# Altium PCB PCBJpepz.PcbDoc (part 1 of 2)
Units mm, origin at the board's own origin, x right, y up, seen from the top; angles counter-clockwise.
Board outline 100 x 110 mm, 2 copper layers (Top Layer, Bottom Layer); 249 components, 163 nets, 729 pads, 129 vias.
Unrouted connection lines stored in the file: 167.
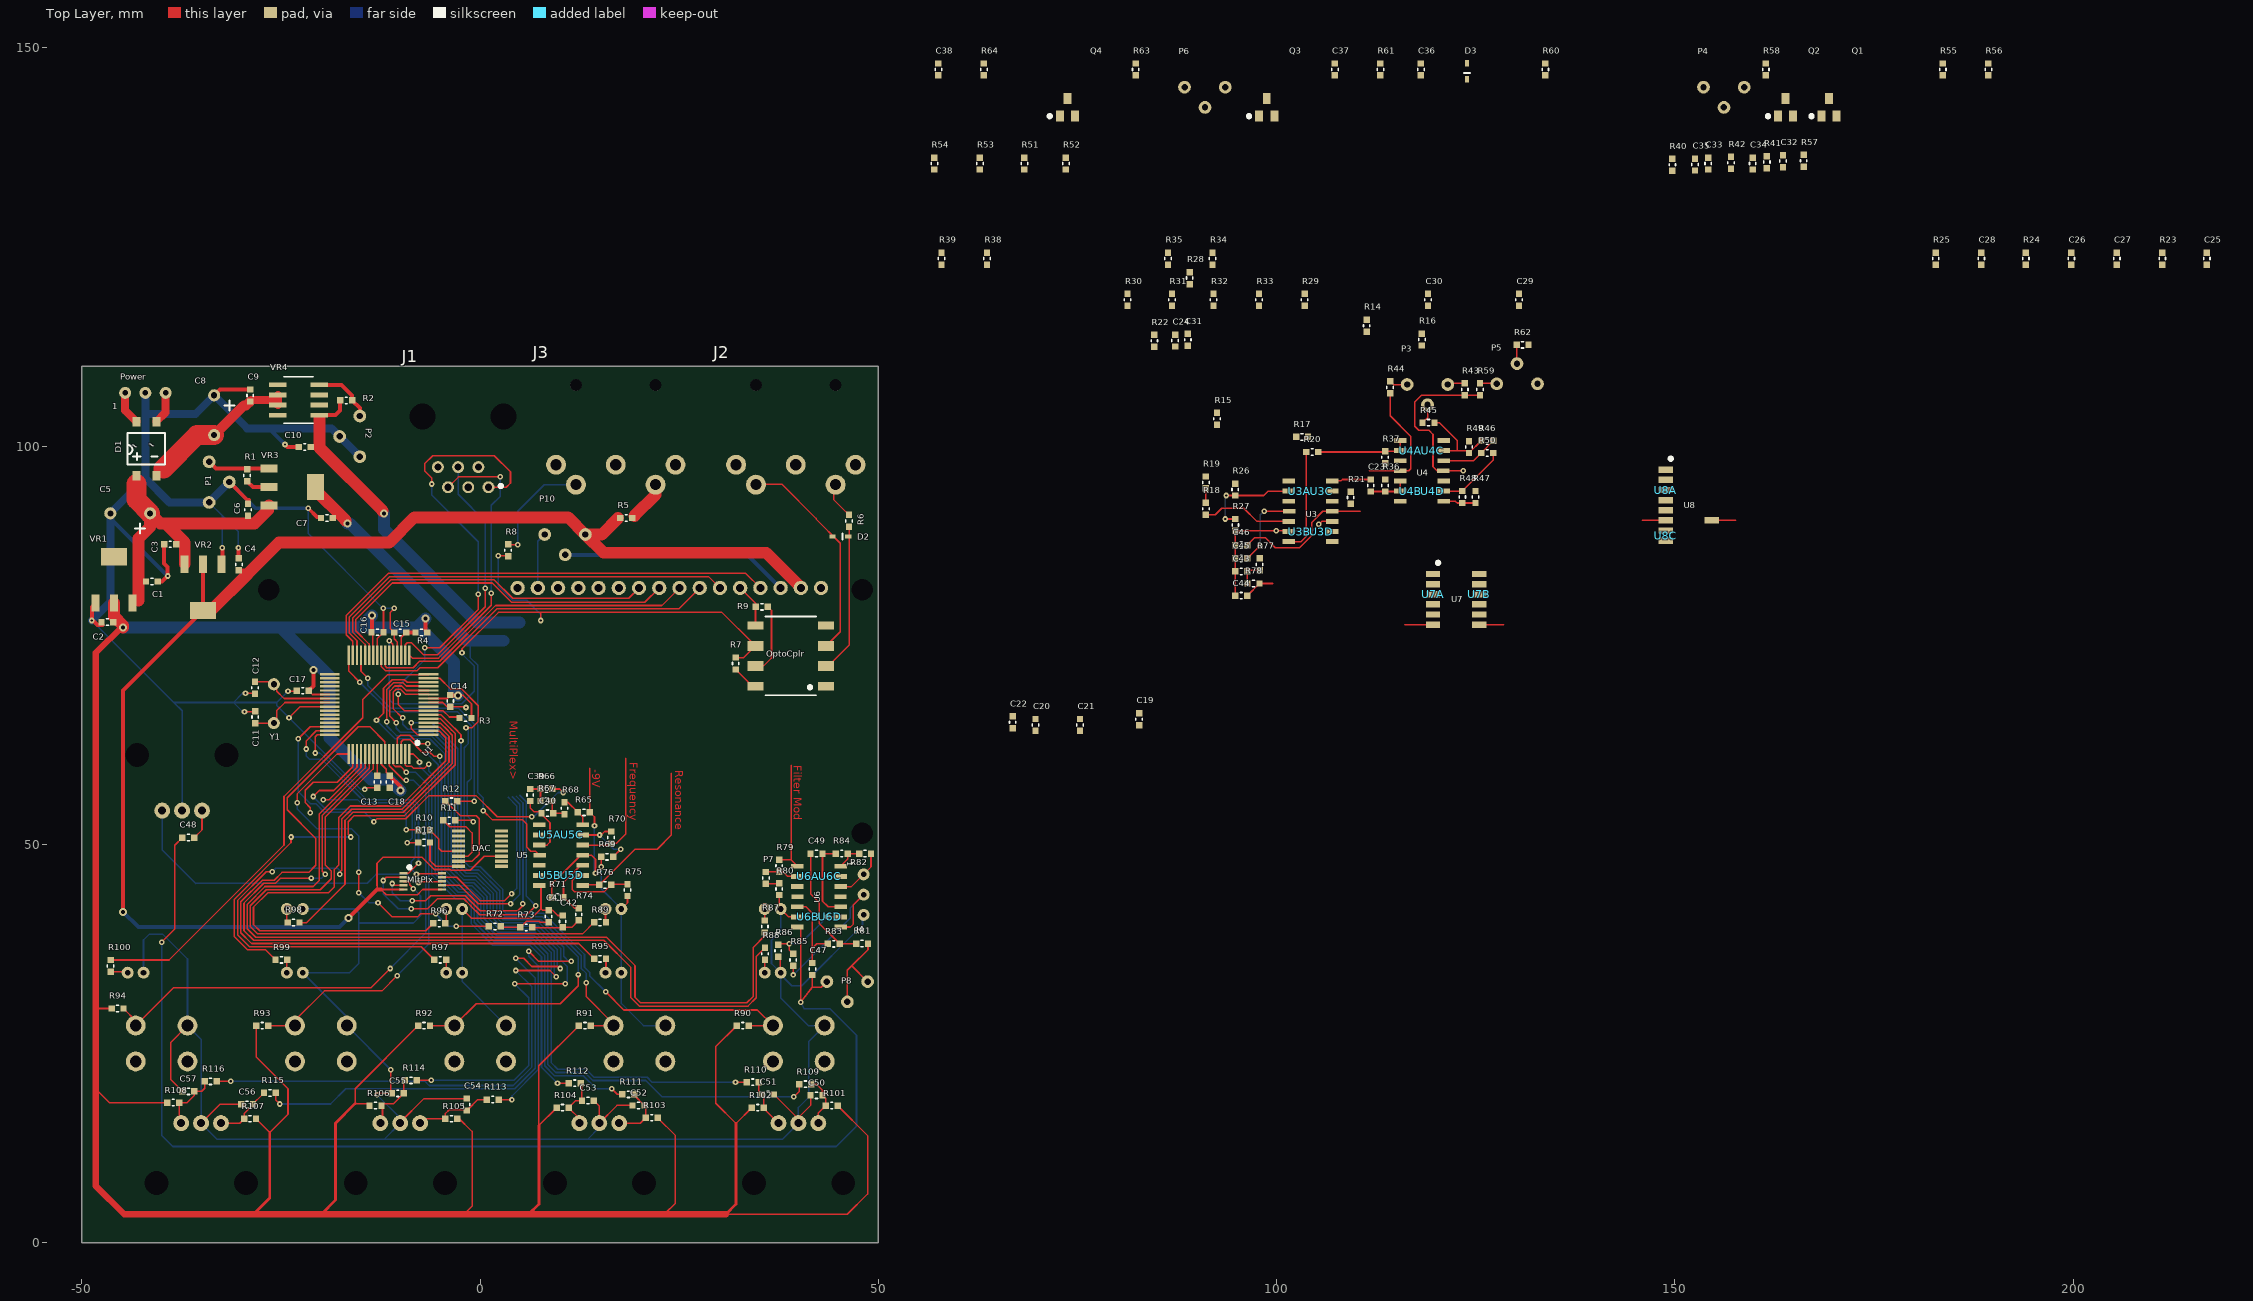
[diagram p0: Top Layer view]
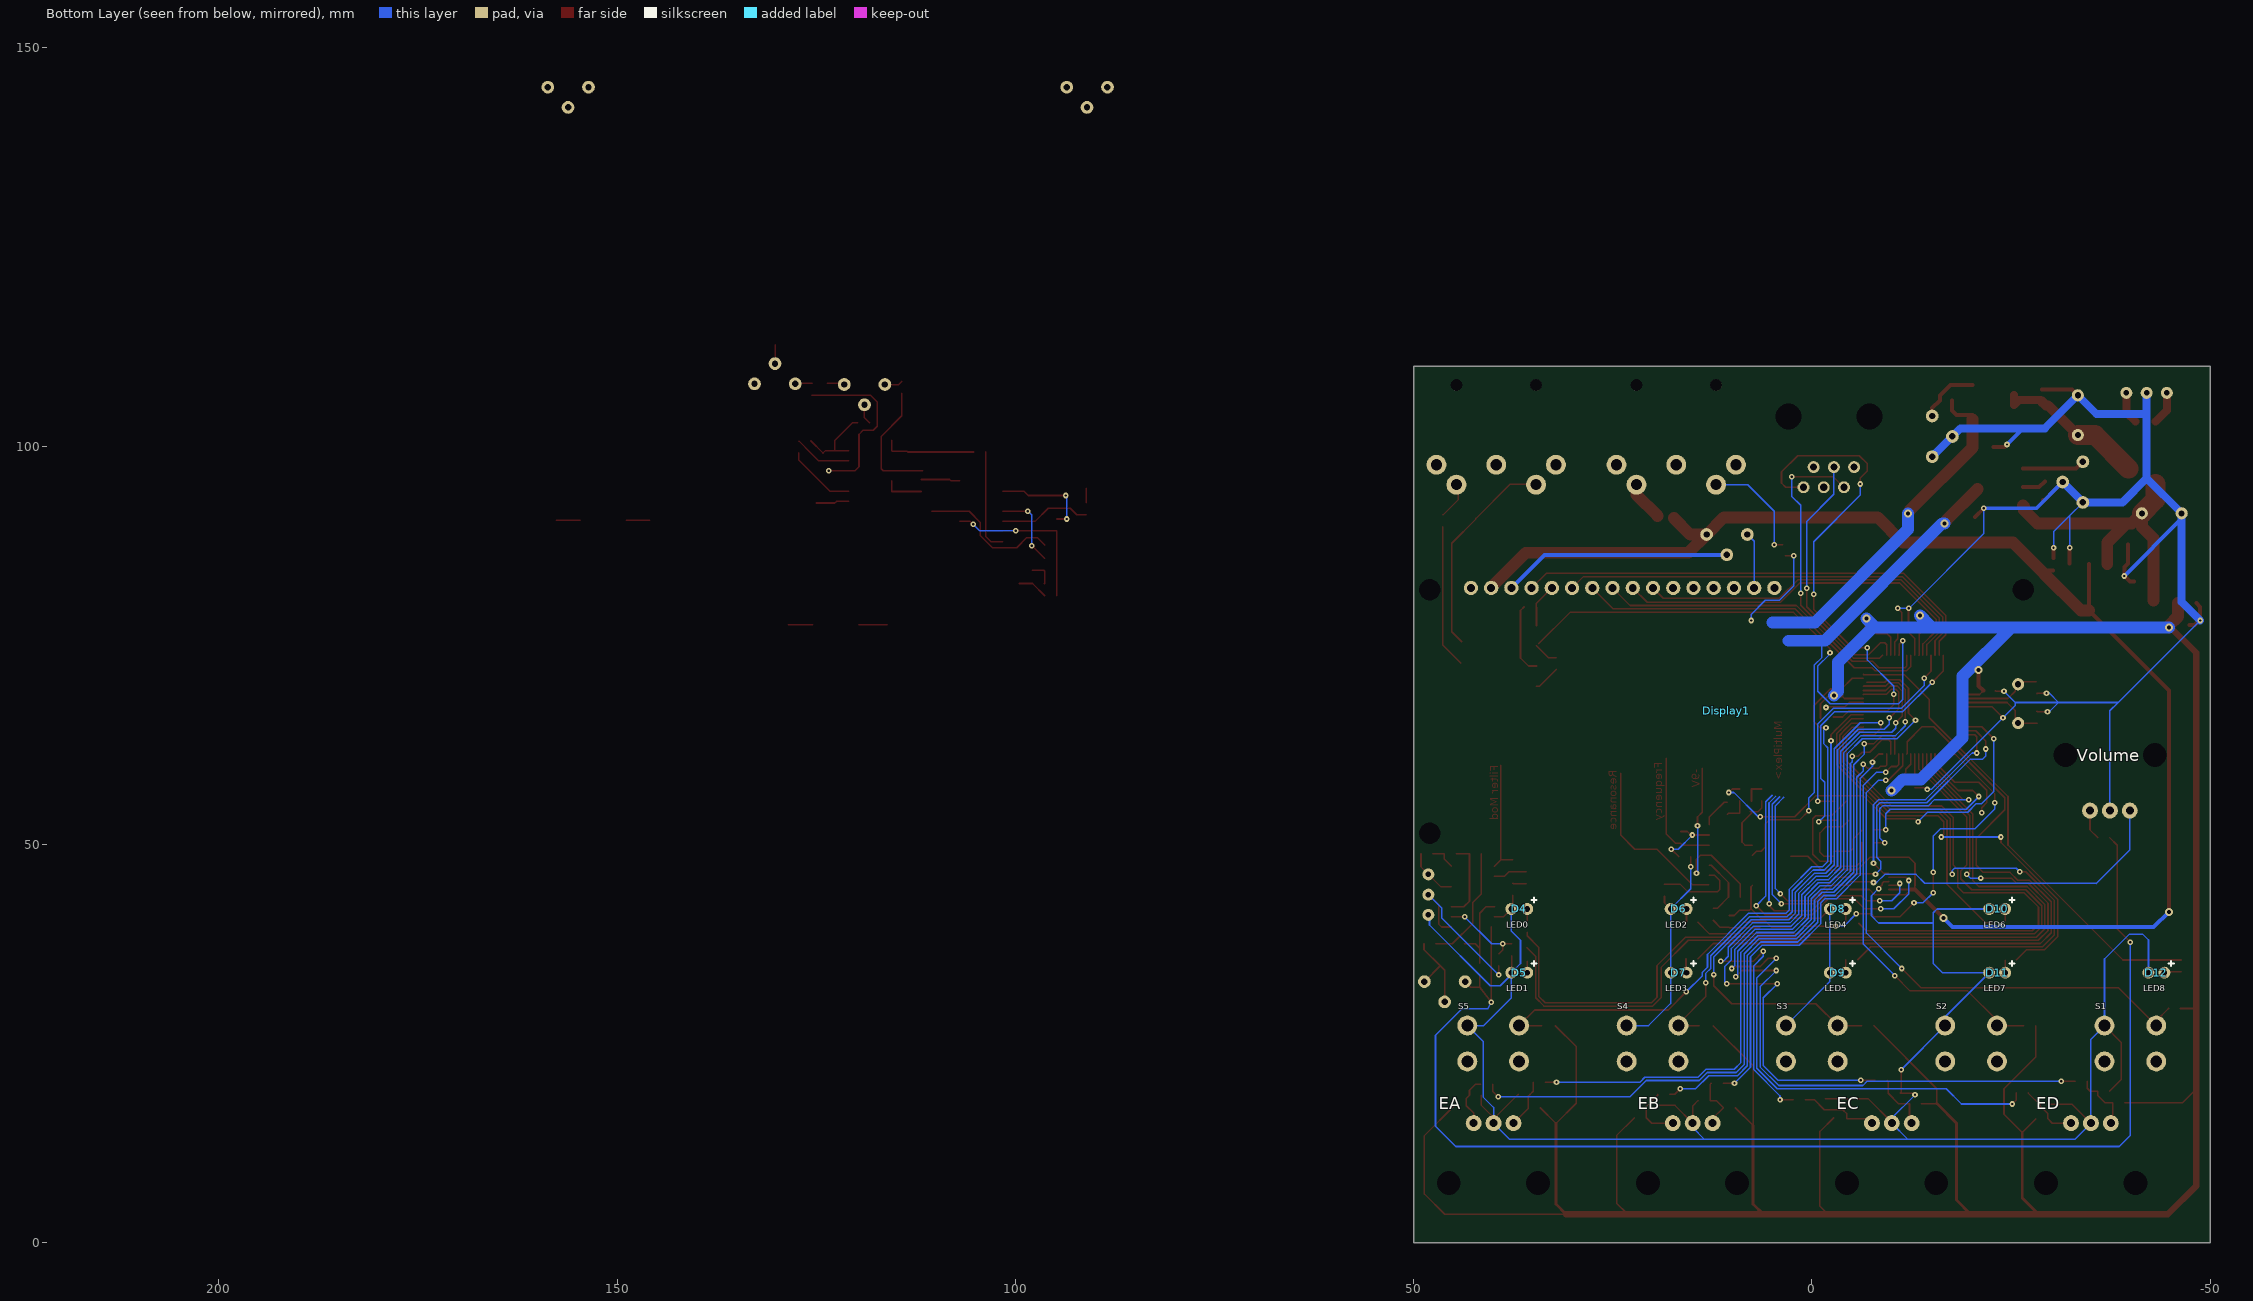
[diagram p1: Bottom Layer view, seen from below]

## Layer stack, top to bottom
Top Solder: solder mask 0.0102, Solder Resist, Dk 3.5
Top Layer: signal copper 0.0356
Dielectric 1: dielectric 0.32, FR-4, Dk 4.8
Bottom Layer: signal copper 0.0356
Bottom Solder: solder mask 0.0102, Solder Resist, Dk 3.5

## Board outline
-50,0 50,0 50,110 -50,110

## Design rules (kind name [scope] priority, off if disabled: settings)
Clearance Clearance_1 [All] p1: gap=0.2
Clearance [All] p2: gap=0.1
ComponentClearance [All] p1: gap=0.01 collisioncheckmode=3 verticalgap=0.01 showdistances=TRUE
MinimumSolderMaskSliver [All] p1: minsoldermaskwidth=0.05
PolygonConnect [All] p1: connectstyle=Relief reliefconductorwidth=0.254 reliefentries=4 polygonreliefangle="90 Angle" airgapwidth=0.254
RoutingVias [All] p1: holewidth=0.711 width=1.27 viastyle="Through Hole" minholewidth=0.711 minwidth=1.27 maxholewidth=0.711 maxwidth=1.27
SilkToSilkClearance [All] p1: silktosilkclearance=0.05
SilkToSolderMaskClearance [IsPad] p1: minsilkscreentomaskgap=0.05 clearancetoexposedcopper=TRUE
SolderMaskExpansion [All] p1: expansion=0.102
UnpouredPolygon [All] p1: allowunpoured=FALSE
Width [All] p1: maxlimit=5 minlimit=0.2 preferedwidth=0.2
25 further rules are at their usual default settings.

## Classes and differential pairs
component class Alimentation: C1 C2 C3 C4 C5 C6 C7 C8 C9 C10 D1 P1 P2 Power R1 R2 VR1 VR2 VR3 VR4
component class "Controle du Filtre": C39 C40 C41 C42 C43 C44 C45 C46 P7 R65 R66 R67 R68 R69 R70 R71 R72 R73 R74 R75 R76 R77 R78 R79 R80 U5C U5D U6 U6A
component class DAC: C19 C20 C21 C22 DAC R10 R11 R12 R13
component class Display: D4 D5 D6 D7 D8 D9 D10 D11 D12 Display1 P10 R87 R88 R89 R90 R91 R92 R93 R94 R95 R96 R97 R98 R99 R100 S1 S2 S3 S4 S5
component class Encodeurs: C50 C51 C52 C53 C54 C55 C56 C57 R101 R102 R103 R104 R105 R106 R107 R108 R109 R110 R111 R112 R113 R114 R115 R116
component class Filtres: C23 C24 C25 C26 C27 C28 C29 C30 C31 C32 C33 C34 C35 C36 C37 C38 D3 P3 P4 P5 P6 Q1 Q2 Q3 Q4 R14 R15 R16 R17 R18 R19 R20 R21 R22 R23 R24 R25 R26 R27 R28 R29 R30 R31 R32 R33 R34 R35 R36 R37 R38 R39 R40 R41 R42 R43 R44 R45 R46 R47 R48 R49 R50 R51 R52 R53 R54 R55 R56 R57 R58 R59 R60 R61 R62 R63 R64 U3 U3A U3B U3C U3D U4 U4A U4B U4C U4D U5 U5A U5B U7 U7A U7B U8 U8A U8C
component class "MIDI IN": D2 OptoCplr R5 R6 R7 R8 R9
component class Multiplexeur: C47 C48 C49 J4 MltPlx P8 R81 R82 R83 R84 R85 R86 U6B U6C U6D
component class PIC: C11 C12 C13 C14 C15 C16 C17 C18 R3 R4 U1 Y1

## Components (designator, comment, footprint, x,y, rotation, side; value= is the part's Value field where it differs from the comment)
C1 "10uF" CAPC1608N -42.799,82.804 r0 top
C2 "100uF" CAPC1608N -45.212,78.105 r180 top
C3 "10uF" CAPC1608N -37.338,87.884 r180 top
C4 "100uF" CAPC1608N -30.099,83.566 r90 top
C5 "2200uF" "Condo electro 13" -43.942,91.567 r180 top
C6 "10uF" CAPC1608N -28.956,90.424 r90 top
C7 "100uF" CAPC1608N -17.653,91.186 r180 top
C8 "2200uF" "Condo electro 13" -33.401,103.886 r270 top
C9 "10uF" CAPC1608N -29.083,107.95 r270 top
C10 "100uF" CAPC1608N -23.622,99.695 r0 top
C11 "20pF" CAPC1608N -28.448,67.564 r270 top
C12 "20pF" CAPC1608N -28.067,68.072 r90 top
C13 "10uF" CAPC1608N -12.7,56.261 r90 top
C14 "0.1uF" CAPC1608N -3.556,66.421 r90 top
C15 "0.1uF" CAPC1608N -11.633,76.403 r0 top
C16 "0.1uF" CAPC1608N -11.303,76.835 r180 top
C17 "0.1uF" CAPC1608N -23.876,69.088 r0 top
C18 "0.1uF" CAPC1608N -11.176,56.261 r90 top
C19 "10uF" CAPC1608N 82.931,64.135 r90 top
C20 "10uF" CAPC1608N 69.926,63.411 r90 top
C21 "10uF" CAPC1608N 75.514,63.411 r90 top
C22 "0.1uF" CAPC1608N 67.056,63.754 r90 top
C23 "0.1uF" CAPC1608N 112.014,93.472 r90 top
C24 "5uF" CAPC1608N 87.452,111.671 r90 top
C25 "0.1uF" CAPC1608N 216.992,121.958 r90 top
C26 "5uF" CAPC1608N 199.974,121.958 r90 top
C27 "5uF" CAPC1608N 205.689,121.958 r90 top
C28 "22pF" CAPC1608N 188.671,121.958 r90 top
C29 "5uF" CAPC1608N 130.632,116.789 r90 top
C30 "5uF" CAPC1608N 119.202,116.789 r90 top
C31 "5uF" CAPC1608N 88.646,114.935 r270 top
C32 "5uF" CAPC1608N 163.373,137.376 r270 top
C33 "220pF" CAPC1608N 154.381,133.896 r90 top
C34 "220pF" CAPC1608N 159.969,133.896 r90 top
C35 "5uF" CAPC1608N 152.73,133.769 r90 top
C36 "100pF" CAPC1608N 118.313,145.707 r90 top
C37 "5uF" CAPC1608N 107.518,145.707 r90 top
C38 "5uF" CAPC1608N 57.734,145.707 r90 top
C39 "10uF" CAPC1608N 6.477,54.61 r90 top
C40 "10uF" CAPC1608N 6.858,53.721 r0 top
C41 "10uF" CAPC1608N 8.382,42.545 r270 top
C42 "10uF" CAPC1608N 10.16,41.91 r270 top
C43 "10uF" CAPC1608N 93.98,84.074 r0 top
C44 "10uF" CAPC1608N 93.98,81.026 r0 top
C45 "5uF" CAPC1608N 97.155,86.106 r180 top
C46 "5uF" CAPC1608N 93.98,87.376 r0 top
C47 "47pF" CAPC1608N 41.91,32.766 r90 top
C48 "4.7uF" CAPC1608N -35.052,51.054 r180 top
C49 "4.7uF" CAPC1608N 40.64,48.641 r0 top
C50 "Cap" CAPC1608N 40.64,18.288 r0 top
C51 "Cap" CAPC1608N 37.719,18.796 r180 top
C52 "Cap" CAPC1608N 18.288,17.018 r0 top
C53 "Cap" CAPC1608N 15.113,18.034 r180 top
C54 "Cap" CAPC1608N -1.905,18.923 r270 top
C55 "Cap" CAPC1608N -11.938,18.542 r0 top
C56 "Cap" CAPC1608N -30.861,17.145 r0 top
C57 "Cap" CAPC1608N -38.227,18.796 r0 top
D1 "MB8S" MB8S -41.91,96.266 r0 top
D2 "1N914" 1N914 47.625,89.535 r90 top
D3 "1N914" 1N914 124.79,144.691 r0 top
D4 "LED0" LED 39,41 r180 bottom
D5 "LED1" LED 39,33 r180 bottom
D6 "LED2" LED 19,41 r180 bottom
D7 "LED3" LED 19,33 r180 bottom
D8 "LED4" LED -1,41 r180 bottom
D9 "LED5" LED -1,33 r180 bottom
D10 "LED6" LED -21,41 r180 bottom
D11 "LED7" LED -21,33 r180 bottom
D12 "LED8" LED -41,33 r180 bottom
DAC "PCM1781" PCM1781 1.27,49.022 r270 top (schematic designator U2)
Display1 "16x2 LCD" DISPLAY 48,82 r180 bottom
EA "EC12E" EC12E 39.956,15 r0 bottom
EB "EC12E" EC12E 14.956,15 r0 bottom
EC "EC12E" EC12E -10.044,15 r0 bottom
ED "EC12E" EC12E -35.044,15 r0 bottom
J1 "Program/Debug" RJ11 -13.335,91.567 r0 top
J2 "Midi IN" "SOCKET MIDI" 21.209,92.583 r0 top
J3 "Midi THRU" "SOCKET MIDI" -1.397,92.583 r0 top
J4 "Phonejack3" "Header 3" 48.133,43.688 r270 top
MltPlx "ADG704" ADG704 -11.303,48.006 r270 top (schematic designator U9)
OptoCplr "6N139" 6N139 44.958,68.707 r90 top (schematic designator U10)
P1 "9V ADJ" "BOURNS Trim pot" -34.036,95.504 r90 top
P2 "-9V ADJ" "BOURNS Trim pot" -15.113,101.219 r270 top
P3 "Initial Reso" "BOURNS Trim pot" 118.948,107.734 r0 top
P4 "V/Oct Trim" "BOURNS Trim pot" 156.159,145.072 r0 top
P5 "Initial Freq" "BOURNS Trim pot" 130.175,107.823 r180 top
P6 "Hi compensate" "BOURNS Trim pot" 91.008,145.072 r0 top
P7 "Mod amount" CAPC1608N 36.068,44.196 r90 top
P8 "Output trim" "BOURNS Trim pot" 46.101,32.766 r0 top
P10 "1K lin" "BOURNS Trim pot" 10.668,88.9 r0 top
Power "12V AC IN" "Header 3" -42.037,106.68 r0 top
Q1 "2N3906" 2N3906 169.367,142.532 r0 top
Q2 "2N3906" 2N3906 163.906,142.532 r0 top
Q3 "2N3904" 2N3906 98.755,142.532 r0 top
Q4 "2N3904" 2N3906 73.736,142.532 r0 top
R1 "120" CAPC1608N -29.464,97.917 r270 top
R2 "240" CAPC1608N -18.415,105.537 r0 top
R3 "10k" CAPC1608N -3.429,65.659 r0 top
R4 "10" CAPC1608N -8.966,76.403 r0 top
R5 "Res1" CAPC1608N 19.939,91.186 r180 top
R6 "Res1" CAPC1608N 46.101,92.202 r270 top
R7 "330" CAPC1608N 31.877,74.295 r270 top
R8 "Res1" CAPC1608N 3.302,88.519 r270 top
R9 "1k" CAPC1608N 33.782,79.629 r0 top
R10 "100" CAPC1608N -8.636,51.562 r0 top
R11 "100" CAPC1608N -2.286,53.213 r180 top
R12 "100" CAPC1608N -2.032,55.626 r180 top
R13 "100" CAPC1608N -8.636,50.038 r0 top
R14 "300k" CAPC1608N 111.506,113.538 r90 top
R15 "2k" CAPC1608N 92.71,101.854 r90 top
R16 "2k" CAPC1608N 118.44,111.798 r90 top
R17 "200k" CAPC1608N 101.6,100.965 r0 top
R18 "100k" CAPC1608N 91.313,90.551 r90 top
R19 "100k" CAPC1608N 91.313,93.853 r90 top
R20 "49.9k" CAPC1608N 102.87,99.06 r0 top
R21 "150k" CAPC1608N 109.093,95.123 r270 top
R22 "4.7M" CAPC1608N 84.836,111.633 r90 top
R23 "2k" CAPC1608N 211.404,121.958 r90 top
R24 "180k" CAPC1608N 194.259,121.958 r90 top
R25 "4.7M" CAPC1608N 182.956,121.958 r90 top
R26 "150k" CAPC1608N 94.996,92.964 r90 top
R27 "39k" CAPC1608N 94.615,91.694 r270 top
R28 "300k" CAPC1608N 89.281,119.507 r90 top
R29 "49.9k" CAPC1608N 103.708,116.789 r90 top
R30 "39k" CAPC1608N 81.483,116.789 r90 top
R31 "100" CAPC1608N 87.071,116.789 r90 top
R32 "100" CAPC1608N 92.278,116.789 r90 top
R33 "43k" CAPC1608N 97.993,116.789 r90 top
R34 "150k" CAPC1608N 92.151,121.958 r90 top
R35 "30k" CAPC1608N 86.563,121.958 r90 top
R36 "100k" CAPC1608N 113.411,96.647 r270 top
R37 "100k" CAPC1608N 113.411,100.203 r270 top
R38 "20k" CAPC1608N 63.83,121.958 r90 top
R39 "20k" CAPC1608N 58.115,121.958 r90 top
R40 "4.7k" CAPC1608N 149.479,136.906 r270 top
R41 "100" CAPC1608N 161.341,137.249 r270 top
R42 "30k" CAPC1608N 156.845,137.16 r270 top
R43 "50k" CAPC1608N 123.825,105.537 r90 top
R44 "50k" CAPC1608N 114.046,108.966 r270 top
R45 "100k" CAPC1608N 117.475,102.743 r0 top
R46 "120k" CAPC1608N 124.841,100.457 r0 top
R47 "30k" CAPC1608N 124.765,95.199 r270 top
R48 "100k" CAPC1608N 123.114,95.199 r270 top
R49 "100k" CAPC1608N 123.952,101.473 r270 top
R50 "100k" CAPC1608N 124.841,98.933 r0 top
R51 "7.5k" CAPC1608N 68.529,133.896 r90 top
R52 "7.5k" CAPC1608N 73.736,133.896 r90 top
R53 "2k" CAPC1608N 62.941,133.896 r90 top
R54 "100k" CAPC1608N 57.226,133.896 r90 top
R55 "100k" CAPC1608N 183.845,145.707 r90 top
R56 "30k" CAPC1608N 189.56,145.707 r90 top
R57 "1M" CAPC1608N 166.37,134.239 r90 top
R58 "100k" CAPC1608N 161.62,145.707 r90 top
R59 "33k" CAPC1608N 125.73,105.537 r90 top
R60 "33k" CAPC1608N 133.934,145.707 r90 top
R61 "10k" CAPC1608N 113.233,145.707 r90 top
R62 "100k" CAPC1608N 129.286,112.522 r0 top
R63 "475" CAPC1608N 82.499,145.707 r90 top
R64 "10k" CAPC1608N 63.449,145.707 r90 top
R65 "18K" CAPC1608N 14.605,54.229 r180 top
R66 "2k" CAPC1608N 9.906,57.15 r180 top
R67 "2k" CAPC1608N 6.731,55.245 r0 top
R68 "3.3k" CAPC1608N 10.795,52.959 r90 top
R69 "10k" CAPC1608N 17.526,48.641 r180 top
R70 "10k" CAPC1608N 16.637,49.276 r90 top
R71 "18K" CAPC1608N 8.128,43.18 r0 top
R72 "2k" CAPC1608N 0.254,39.497 r0 top
R73 "2k" CAPC1608N 4.191,39.37 r0 top
R74 "3.3k" CAPC1608N 12.573,39.624 r90 top
R75 "10k" CAPC1608N 18.288,45.847 r270 top
R76 "10k" CAPC1608N 14.097,44.704 r0 top
R77 "2k" CAPC1608N 97.663,86.741 r270 top
R78 "2k" CAPC1608N 95.504,82.55 r0 top
R79 "10k" CAPC1608N 37.338,48.895 r270 top
R80 "10k" CAPC1608N 37.338,45.974 r270 top
R81 "50k" CAPC1608N 46.355,37.338 r0 top
R82 "10k" CAPC1608N 46.736,48.641 r0 top
R83 "330" CAPC1608N 45.974,37.719 r180 top
R84 "5k" CAPC1608N 43.815,48.641 r0 top
R85 "10k" CAPC1608N 39.497,33.909 r90 top
R86 "10k" CAPC1608N 37.211,38.227 r270 top
R87 "220" CAPC1608N 35.941,38.1 r90 top
R88 "220" CAPC1608N 35.56,37.846 r270 top
R89 "220" CAPC1608N 13.462,40.005 r0 top
R90 "10K" CAPC1608N 34.544,27.432 r180 top
R91 "10K" CAPC1608N 14.732,27.432 r180 top
R92 "10K" CAPC1608N -5.461,27.432 r180 top
R93 "10K" CAPC1608N -25.781,27.432 r180 top
R94 "10K" CAPC1608N -43.942,29.591 r180 top
R95 "220" CAPC1608N 13.462,35.433 r0 top
R96 "220" CAPC1608N -6.731,39.878 r0 top
R97 "220" CAPC1608N -6.604,35.306 r0 top
R98 "220" CAPC1608N -21.844,40.386 r180 top
R99 "220" CAPC1608N -26.543,35.306 r0 top
R100 "220" CAPC1608N -46.609,36.322 r270 top
R101 "10K" CAPC1608N 45.72,17.399 r180 top
R102 "10K" CAPC1608N 36.449,17.145 r180 top
R103 "10K" CAPC1608N 23.114,15.875 r180 top
R104 "10K" CAPC1608N 11.938,17.145 r180 top
R105 "10K" CAPC1608N -2.032,15.748 r180 top
R106 "10K" CAPC1608N -11.557,17.399 r180 top
R107 "10K" CAPC1608N -27.305,15.748 r180 top
R108 "10K" CAPC1608N -36.957,17.78 r180 top
R109 "330" CAPC1608N 39.243,19.685 r0 top
R110 "330" CAPC1608N 32.639,19.939 r0 top
R111 "330" CAPC1608N 17.018,18.415 r0 top
R112 "330" CAPC1608N 10.287,19.812 r0 top
R113 "330" CAPC1608N 3.175,18.161 r180 top
R114 "330" CAPC1608N -7.112,20.574 r180 top
R115 "330" CAPC1608N -24.816,18.999 r180 top
R116 "330" CAPC1608N -32.258,20.447 r180 top
S1 "BUT0" "PUSH BUTTON" -40,25 r180 bottom
S2 "BUT1" "PUSH BUTTON" -20,25 r180 bottom
S3 "BUT2" "PUSH BUTTON" 0,25 r180 bottom
S4 "BUT3" "PUSH BUTTON" 20,25 r180 bottom
S5 "BUT4" "PUSH BUTTON" 40,25 r180 bottom
U1 "PIC32MX575F512H" PIC32 -6.985,61.849 r180 top
U3 "TL084" "TL084 - Alim" 104.267,91.821 r270 top
U3A "TL084" "TL084 - 3PADS" 104.234,94.361 r270 top
U3B "TL084" "TL084 - 3PADS" 104.234,89.281 r270 top
U3C "TL084" "TL084 - 3PADS" 104.3,94.361 r90 top
U3D "TL084" "TL084 - 3PADS" 104.3,89.281 r90 top
U4 "TL084" "TL084 - Alim" 118.237,96.901 r270 top
U4A "TL084" "TL084 - 3PADS" 118.204,99.441 r270 top
U4B "TL084" "TL084 - 3PADS" 118.204,94.361 r270 top
U4C "TL084" "TL084 - 3PADS" 118.27,99.441 r90 top
U4D "TL084" "TL084 - 3PADS" 118.27,94.361 r90 top
U5 "TL084" "TL084 - Alim" 10.16,48.641 r270 top
U5A "TL084" "TL084 - 3PADS" 10.127,51.181 r270 top
U5B "TL084" "TL084 - 3PADS" 10.127,46.101 r270 top
U5C "TL084" "TL084 - 3PADS" 10.193,51.181 r90 top
U5D "TL084" "TL084 - 3PADS" 10.193,46.101 r90 top
U6 "TL084" "TL084 - Alim" 42.545,43.434 r270 top
U6A "TL084" "TL084 - 3PADS" 42.512,45.974 r270 top
U6B "TL084" "TL084 - 3PADS" 42.512,40.894 r270 top
U6C "TL084" "TL084 - 3PADS" 42.578,45.974 r90 top
U6D "TL084" "TL084 - 3PADS" 42.578,40.894 r90 top
U7 "LM13700" "LM13700 - Alim" 120.269,85.344 r270 top
U7A "LM13700" "LM13700 - A" 120.269,85.344 r270 top
U7B "LM13700" "LM13700 - B" 120.269,85.344 r270 top
U8 "LM13700" "LM13700 - Alim" 149.479,98.425 r270 top
U8A "LM13700" "LM13700 - A" 149.479,98.425 r270 top
U8C "LM13700" "LM13700 - C" 149.479,98.425 r270 top
Volume "Volume" "ALPS Potentiometer" -37.048,60.706 r180 bottom (schematic designator P9)
VR1 "LM1117-3.3" LM1117-SOT -45.974,86.106 r0 top
VR2 "LM1117-5.0" LM1117-SOT -34.798,79.375 r180 top
VR3 "LM1117-ADJ" LM1117-SOT -20.701,94.869 r270 top
VR4 "LM337L" LM337L -25.4,105.156 r90 top
Y1 "12.288 MHz" Xtal -25.908,70.104 r270 top

## Footprints (in the part's own frame and the unit in brackets; to place one, negate y for a bottom-side part, rotate by r counter-clockwise, add the part's x,y. Pads: shape width x height; smd on the part's side, far side on the other; paste and mask are expansions set on the pad)
1N914 [mm] "Diode"
  rect 0.5x0.8 smd: 1(-0.889,3.396) 2(-0.889,1.396)
  silkscreen extent -1.27,2.16 -0.51,2.16
2N3906 [mm]
  rect 1x1.4 smd: 1(0.95,-1.1) 2(-0.95,-1.1) 3(0,1.1)
  silkscreen extent -2.42,-1.3 -2.02,-0.9
6N139 [mil] "Optocoupleur"
  rect 40x78.74 smd: 1(45,60) 4(345,60) 5(345,409.13) 8(45,409.13)
  rect 50x78.74 smd: 2(145,60) 3(245,60) 6(245,409.13) 7(145,409.13)
  silkscreen extent 0,110 390,360
ADG704 [mm] "Multiplexeur"
  rect 0.3x1 smd mask+0.05: 1(1.651,1.651) 2(2.151,1.651) 3(2.659,1.651) 4(3.159,1.651) 5(3.675,1.651) 6(3.675,6.498) 7(3.159,6.498) 8(2.659,6.498) 9(2.151,6.498) 10(1.651,6.498)
  silkscreen extent 0.69,2.21 1.09,2.61
"ALPS Potentiometer" [mm] "Encodeur"
  round 0 hole 3 mask+0: 0(-5.207,0.531) 0(6.005,0.531)
  round 2 hole 1 mask+0: 1(-2.123,-6.469) 2(2.877,-6.469) 3(0.377,-6.469)
"BOURNS Trim pot" [mm]
  round 1.6 hole 0.8: 1(-2.57,0) 2(2.54,0) 3(0,-2.54)
CAPC1608N [mm]
  rect 0.8x0.8 smd: 1(0.838,0.203) 2(2.337,0.203)
  silkscreen extent 1.45,-0.2 1.73,0.6
"Condo electro 13" [mil]
  round 60 hole 30: 1(-98.43,0) 2(98.43,0)
  silkscreen extent -73,50 -23,100
DISPLAY [mm]
  round 0 hole 2.7 mask+0: 0(0,-30.607) 0(0,0) 0(74.549,0)
  round 1.8 hole 1: 1(5.2,0.193) 2(7.74,0.193) 3(10.28,0.193) 4(12.82,0.193) 5(15.36,0.193) 6(17.9,0.193) 7(20.44,0.193) 8(22.98,0.193) 9(25.52,0.193) 10(28.06,0.193) 11(30.6,0.193) 12(33.14,0.193) 13(35.68,0.193) 14(38.22,0.193) 15(40.76,0.193) 16(43.3,0.193)
EC12E [mm] "Encodeur"
  round 0 hole 3 mask+0: 0(-5.584,7.5) 0(5.628,7.493)
  round 2 hole 1 mask+0: 1(-2.5,0) 2(2.5,0) 3(0,0)
"Header 3" [mm]
  round 1.5 hole 0.7: 1(-2.54,0) 2(0,0) 3(2.54,0)
LED [mm]
  round 1.5 hole 0.7: 1(3.27,0.889) 2(1.27,0.889)
  silkscreen extent 3.81,1.71 4.44,2.35
LM337L [mm]
  rect 0.6x2.2 smd mask+0.1: 1(0,0) 1(0,-5.2) 1(1.27,0) 1(1.27,-5.2) 2(2.54,-5.2) 3(-1.27,-5.2) ""(-1.27,0) ""(2.54,0)
  round 0.4 on Top Overlay: ""(-1.524,-3.549)
  silkscreen extent -2.29,-4.44 3.56,-0.75
LM1117-SOT [mm]
  rect 1x2.15 smd: 1(2.3,-5.8) 2(-2.3,-5.8) 3(0,-5.8)
  rect 3.25x2.15 smd: 3(0,0)
"LM13700 - A" [mm]
  rect 0.8x1.8 smd: 1(1.397,-0.635) 2(2.667,-0.635) 3(3.937,-0.635) 4(5.207,-0.635) 5(6.477,-0.635)
  silkscreen extent -0.2,-0.2 0.2,0.2
"LM13700 - Alim" [mm]
  rect 0.8x1.8 smd: 1(7.747,5.165) 2(7.747,-0.635)
  silkscreen extent -0.2,-0.2 0.2,0.2
"LM13700 - B" [mm]
  rect 0.8x1.8 smd: 1(1.397,5.165) 2(2.667,5.165) 3(3.937,5.165) 4(5.207,5.165) 5(6.477,5.165)
  silkscreen extent -0.2,-0.2 0.2,0.2
"LM13700 - C" [mm]
  rect 0.8x1.8 smd: 1(9.017,-0.635) 2(10.287,-0.635)
  silkscreen extent -0.2,-0.2 0.2,0.2
MB8S [mm]
  rect 1x1.2 smd: 1(-1.25,6.8) 2(1.25,6.8) 3(1.25,0) 4(-1.25,0)
  silkscreen extent -2.35,1.4 2.35,5.4
PCM1781 [mm] "DAC"
  rect 0.4x1.6 smd mask+0.05: 1(-2.667,-4.003) 2(-2.032,-4.003) 3(-1.397,-4.003) 4(-0.762,-4.003) 5(-0.127,-4.003) 6(0.508,-4.003) 7(1.143,-4.003) 8(1.778,-4.003) 9(1.778,1.397) 10(1.143,1.397) 11(0.508,1.397) 12(-0.127,1.397) 13(-0.762,1.397) 14(-1.397,1.397) 15(-2.032,1.397) 16(-2.667,1.397)
  round 0.4 on Top Overlay: 1(-2.54,-2.54)
PIC32 [mm] "PIC32MX575F512H"
  rect 2.5x0.3 smd paste+0 mask+0.05: 1(-0.5,-1.905) 2(-0.5,-2.405) 3(-0.5,-2.913) 4(-0.5,-3.413) 5(-0.5,-3.929) 6(-0.5,-4.429) 7(-0.5,-4.945) 8(-0.5,-5.445) 9(-0.5,-5.961) 10(-0.5,-6.461) 11(-0.5,-6.969) 12(-0.5,-7.469) 13(-0.5,-7.985) 14(-0.5,-8.485) 15(-0.5,-9.001) 16(-0.5,-9.501) 33(11.9,-9.501) 34(11.9,-9.001) 35(11.9,-8.485) 36(11.9,-7.985) 37(11.9,-7.469) 38(11.9,-6.969) 39(11.9,-6.461) 40(11.9,-5.961) 41(11.9,-5.445) 42(11.9,-4.945) 43(11.9,-4.429) 44(11.9,-3.929) 45(11.9,-3.413) 46(11.9,-2.913) 47(11.9,-2.405) 48(11.9,-1.905)
  rect 0.3x2.5 smd paste+0 mask+0.05: 17(1.905,-11.9) 18(2.405,-11.9) 19(2.913,-11.9) 20(3.413,-11.9) 21(3.929,-11.9) 22(4.429,-11.9) 23(4.945,-11.9) 24(5.445,-11.9) 25(5.961,-11.9) 26(6.461,-11.9) 27(6.969,-11.9) 28(7.469,-11.9) 29(7.985,-11.9) 30(8.485,-11.9) 31(9.001,-11.9) 32(9.501,-11.9) 49(9.501,0.5) 50(9.001,0.5) 51(8.485,0.5) 52(7.985,0.5) 53(7.469,0.5) 54(6.969,0.5) 55(6.461,0.5) 56(5.961,0.5) 57(5.445,0.5) 58(4.945,0.5) 59(4.429,0.5) 60(3.929,0.5) 61(3.413,0.5) 62(2.913,0.5) 63(2.405,0.5) 64(1.905,0.5)
  silkscreen extent 0.69,-1.09 1.09,-0.69
"PUSH BUTTON" [mm]
  round 2.5 hole 1.5: 1(3.25,2.25) 2(-3.25,2.25) 3(-3.25,-2.25) 4(3.25,-2.25)
RJ11 [mm] "RJ11 Socket"
  round 0 hole 3.25 mask+0: 0(6.11,12.159) 0(16.27,12.159)
  round 1.5 hole 0.9: 1(14.375,3.269) 2(13.105,5.809) 3(11.835,3.269) 4(10.565,5.809) 5(9.295,3.269) 6(8.025,5.809)
  silkscreen extent 15.72,3.23 16.12,3.63
"SOCKET MIDI" [mm] "Midi"
  round 1.4 hole 1.5 mask+0: 0(13.415,15.08) 0(23.415,15.08)
  round 2.5 hole 1.4: 1(18.415,5.08) 2(25.922,5.08) 3(10.922,5.08) 4(23.415,2.58) 5(13.415,2.58)
"TL084 - 3PADS" [mm] "Ampli-op"
  round 0.4 on Mech1: 0(0,0)
  rect 0.6x1.55 smd: 1(-1.27,-2.7) 2(0,-2.7) 3(1.27,-2.7)
"TL084 - Alim" [mm] "Ampli-op"
  round 0.4 on Top Overlay: 0(-3.81,-1.27)
  round 0.4 on Mech1: 0(-2.54,0) 0(2.54,0)
  rect 0.6x1.55 smd: 1(0,2.7) 2(0,-2.7)
Xtal [mil]
  round 60 hole 30: 1(0,0) 2(192.13,0)

## Part data
C1 C2 C3 C4 C6 C7 C9 C10: library part Cap2, "Capacitor"
C5 C8 C19 C20 C21: library part "Cap Pol1", "Polarized Capacitor (Radial)"
C11 C12 C14 C15 C16 C17 C18 C22 C23 C24 C25 C26 C27 C28 C29 C30 C31 C32 C33 C34 C35 C36 C37 C38 C39 C40 C41 C42 C43 C44 C45 C46 C47 C48 C49: library part "Cap Semi", "Capacitor (Semiconductor SIM Model)"
C13: library part Cap, "Capacitor"
C50 C51 C52 C53 C54 C55 C56 C57: "Capacitor"
D1: library part Bridge1, "Full Wave Diode Bridge"
D2: library part Diode, "Default Diode"
D3: library part "Diode 1N4001", "1 Amp General Purpose Rectifier"
D4: "Typical INFRARED GaAs LED"
D5 D6 D7 D8 D9 D10 D11 D12: library part LED0, "Typical INFRARED GaAs LED"
DAC: library part "PCM1781 DAC"
Display1: library part Display
J1: library part "Header 6H", "Header, 6-Pin, Right Angle"
J2 J3: library part "Header 5", "DIN 5 Pins"
J4: "Jack Socket, 1/4\" [6.5mm], Thru-Hole, Vertical, 3-Conductor Open Circuit (Non-Normalling)"
OptoCplr: library part Optocoupleur
P1 P2 P3 P4 P5 P6 P8 P10 Volume: library part RPot, "Potentiometer"
P7: library part "Res Adj1", "Variable Resistor"
Power: library part "Header 3", "Header, 3-Pin"
Q1 Q2: "PNP General Purpose Amplifier"
Q3 Q4: "NPN General Purpose Amplifier"
R1 R2 R10 R11 R12 R13 R14 R15 R16 R17 R18 R19 R20 R21 R22 R23 R24 R25 R26 R27 R28 R29 R30 R31 R32 R33 R34 R35 R36 R37 R38 R39 R40 R41 R42 R43 R44 R45 R46 R47 R48 R49 R50 R51 R52 R53 R54 R55 R56 R57 R58 R59 R60 R61 R62 R63 R64 R65 R66 R67 R68 R69 R70 R71 R72 R73 R74 R75 R76 R77 R78 R79 R80 R81 R82 R83 R84 R85 R86: library part Res3, "Resistor"
R3 R4 R7 R9 R87 R88 R89 R90 R91 R92 R93 R94 R95 R96 R97 R98 R99 R100 R101 R102 R103 R104 R105 R106 R107 R108 R109 R110 R111 R112 R113 R114 R115 R116: library part Res1, "Resistor"
R5 R6 R8: "Resistor"
S1 S2 S3 S4 S5: library part SW-PB, "Switch"
U1: library part "PIC32 MX575F512H"
U3 U4 U5 U6: library part TL_CLEAN
U7A U7B U8A: library part LM13700_2
U8C: library part LM13700_1
VR1 VR2 VR3 VR4: library part "Volt Reg", "Voltage Regulator"
Y1: library part XTAL, "Crystal Oscillator"

## Via types
v1: diameter 0.7, hole 0.3, Top Layer to Bottom Layer, 119 vias
v2: diameter 1, hole 0.5, Top Layer to Bottom Layer, 10 vias

## Nets (pads, with @x,y where several pads share a name; then routed paths per layer and width w, separated by ;. In a path a pad name is that pad's centre, name@x,y a point inside that pad or via, vN(x,y) a via of type N, cw(c..) or ccw(c..) an arc to the next point about the centre after c; other vN are vias at no path point)
+3,3V: C2.1 C14.2 C15.2 C16.2 C17.2 C18.2 J1.2 R3.2 R4.1 R4.2 R90.2 R91.2 R92.2 R93.2 R94.2 R101.1 R102.2 R103.1 R104.2 R105.1 R106.2 R107.1 R108.2 U1.10 U1.19 U1.26 U1.38 U1.57 VR1.3 | length 453.6
  Top Layer w0.2: -48.26,19.279 -46.558,17.577 R108.2@-39.294,17.577 ; -48.209,29.388 R94.2@-46.279,29.388 ; R107.1@-28.143,15.545 -26.416,13.818 -24.13,16.104 -24.13,19.304 -28.118,23.292 R93.2@-28.118,27.229 ; C17.2@-21.539,69.291 -21.066,68.818 U1.38@-18.885,68.818 ; R106.2@-13.767,17.45 -15.697,17.45 -15.697,19.329 R92.2@-7.798,27.229 ; C16.2@-13.589,76.683 C16.2@-13.64,76.632 -13.504,76.496 -13.504,73.807 U1.26@-13.446,73.749 ; U1.57@-12.43,61.349 -12.43,60.055 -11.795,59.42 -11.795,59.014 C18.2@-11.379,58.598 ; U1.19@-9.898,73.749 -9.898,76.005 C15.2@-9.296,76.606 ; U1.10@-6.485,68.31 -4.105,68.31 C14.2@-3.708,68.707 ; v2(-2.794,68.707) -2.159,68.707 -1.092,67.64 R3.2@-1.092,65.862 ; R105.1@-2.743,15.672 -1.016,13.945 -1.016,4.572 -1.905,3.683 ; R104.2@9.601,16.942 7.366,14.707 7.366,22.2 R91.2@12.395,27.229 ; R103.1@22.276,15.672 24.511,13.437 24.511,4.953 23.178,3.619 ; 30.861,3.556 46.101,3.556 48.641,6.096 48.641,13.437 R101.1@44.882,17.196 ; R90.2@32.207,27.229 29.591,24.613 29.591,17.501 32.131,14.961 R102.2@34.112,16.942
  Top Layer w0.35: -28.448,3.556 -26.416,5.588 -26.416,13.818 ; -19.939,3.556 -18.161,5.334 -18.161,14.986 -15.697,17.45 ; 6.096,3.556 7.366,4.826 7.366,14.707 ; 30.861,3.556 32.131,4.826 32.131,14.961
  Top Layer w0.5: C17.2@-21.539,69.291 -20.955,69.875 v2(-20.955,71.882) ; C16.2@-13.589,76.683 v2(-13.589,78.74) ; C18.2@-11.379,58.598 -10.033,57.252 v2(-10.033,56.769) ; C15.2@-9.296,76.606 R4.1@-8.128,76.606 ; v2(-6.858,78.359) -6.858,76.835 R4.2@-6.629,76.606 ; C14.2@-3.708,68.707 v2(-2.794,68.707)
  Top Layer w0.8: v2@-44.831,77.47 -48.26,74.041 -48.26,19.279 -48.26,7.112 -44.704,3.556 -28.448,3.556 -19.939,3.556 6.096,3.556 30.861,3.556
  Top Layer w1.5: VR1.3@-45.974,80.306 -45.974,78.613 -44.831,77.47 v2(-44.831,77.216)
  Bottom Layer w1.5: v2(-44.831,77.216) -25.019,77.216 ; -14.732,77.597 v2(-13.589,78.74) ; v2(-10.033,56.769) -11.43,58.166 -13.716,58.166 -18.923,63.373 -18.923,71.12 -25.019,77.216 ; v2(-6.858,78.359) -8.001,77.216 ; v2(-2.794,68.707) -3.302,69.215 -3.302,72.898 -7.62,77.216 -8.001,77.216 ; -25.019,77.216 -8.001,77.216
+5V: C4.1 C21.1 C22.2 DAC.11 Display1.2 MltPlx.5 MltPlx.6 OptoCplr.8 P10.2 R5.2 R7.2 VR2.3 | length 207.5
  Top Layer w0.2: -12.954,44.831 -12.954,47.625 -12.192,48.387 -7.297,48.387 -5.754,46.844 -3.757,46.844 -3.657,46.744 -1.262,46.744 0.508,48.514 DAC.11@2.667,48.514 ; -12.946,44.331 -12.946,44.823 ; MltPlx.5@-9.652,44.331 -12.454,44.331 -11.811,43.688 -7.874,43.688 -7.231,44.331 MltPlx.6@-4.805,44.331 ; R7.2@32.08,71.958 34.188,69.85 OptoCplr.8@34.566,69.85
  Top Layer w0.5: v2(-44.831,41.529) -44.831,69.342 VR2.3@-34.798,79.375 VR2.3@-34.798,85.175 ; C4.1@-30.302,84.404 -28.753,84.404 ; v2(-16.51,40.767) -12.946,44.331 -12.454,44.331
  Top Layer w1.5: VR2.3@-34.798,79.375 -33.782,79.375 -29.146,84.01 ; -28.753,84.404 -25.273,87.884 -11.43,87.884 -8.255,91.059 11.049,91.059 P10.2@13.208,88.9 ; R5.2@17.323,90.983 15.24,88.9 P10.2@13.208,88.9 ; Display1.2@40.26,82.193 40.26,82.269 35.915,86.614 15.494,86.614 P10.2@13.208,88.9
  Bottom Layer w0.5: v2(-44.831,41.529) -42.926,39.624 -17.653,39.624 v2(-16.51,40.767)
+9V: C7.1 C24.1 C26.1 C30.1 C32.1 C37.1 C45.1 R1.2 R38.1 R39.1 R44.2 R57.1 R60.2 U3.2 U4.2 U5.2 U6.2 U7.1 U8.1 VR3.3 | length 98.9
  Top Layer w0.2: v1(0.381,54.229) 1.543,53.067 5.334,53.067 5.842,52.559 5.842,49.657 6.35,49.149 6.952,49.149 U5.2@7.46,48.641 ; C45.1@96.317,85.903 v1(97.917,87.503) ; v1(98.425,91.821) U3.2@101.567,91.821 ; 111.633,96.901 U4.2@115.537,96.901 116.586,96.901 116.84,97.155 116.84,101.219 114.249,103.81 R44.2@114.249,106.629 ; U7.1@125.434,77.597 128.524,77.597 ; U8.1@154.644,90.678 157.607,90.678
  Top Layer w0.5: R1.2@-29.261,95.58 -28.55,94.869 VR3.3@-26.501,94.869
  Top Layer w1.5: VR3.3@-20.828,94.615 v2@-16.891,90.678
  Bottom Layer w0.2: -1.27,75.175 -1.27,73.464 -0.324,72.518 -0.324,56.515 0.381,55.81 v1(0.381,54.229) ; v1(97.917,87.503) 97.917,91.313 v1(98.425,91.821)
  Bottom Layer w1.5: v2(-16.637,90.297) -16.392,90.297 -1.66,75.565 2.921,75.565
-9V: C10.2 C27.2 C29.2 C31.2 C35.2 C38.2 C46.2 R2.1 R30.2 R33.2 R40.1 R43.1 R55.1 R59.1 R65.1 R71.1 U3.1 U4.1 U5.1 U6.1 U7.2 U8.2 VR4.3 | length 113.5
  Top Layer w0.2: R71.1@8.966,43.383 8.966,44.996 12.611,48.641 U5.1@12.86,48.641 13.97,48.641 14.478,48.133 v1(14.478,46.355) ; 13.767,59.563 R65.1@13.767,54.026 14.351,53.442 v1@14.351,52.578 ; C46.2@96.317,87.579 97.257,88.519 98.552,88.519 99.822,87.249 102.87,87.249 104.394,88.773 104.394,90.424 105.791,91.821 U3.1@106.967,91.821 110.49,91.821 ; 116.078,77.597 U7.2@119.634,77.597 ; v1(123.444,96.901) U4.1@120.937,96.901 120.142,96.901 119.634,97.409 119.634,101.473 119.126,101.981 117.856,101.981 117.348,102.489 117.348,105.537 118.186,106.375 R43.1@123.622,106.375 R59.1@125.527,106.375 ; 145.923,90.678 U8.2@148.844,90.678
  Top Layer w0.5: VR4.3@-20.2,103.886 -18.161,103.886 -17.577,104.47 R2.1@-17.577,105.74
  Top Layer w1.5: -20.2,103.378 -20.2,99.829 v2@-12.255,91.884
  Bottom Layer w0.2: v1@14.336,52.309 14.336,46.497 v1(14.478,46.355)
  Bottom Layer w1.5: v2(-12.065,91.567) -12.065,89.535 -0.381,77.851 4.953,77.851
  other v1: 14.351,52.324
GND: C1.2 C2.2 C3.2 C4.2 C5.2 C6.2 C7.2 C8.1 C9.1 C10.1 C11.1 C12.1 C13.1 C14.1 C15.1 C16.1 C17.1 C18.1 C24.2 C26.2 C27.1 C29.1 C30.2 C31.1 C32.2 C33.1 C34.1 C35.1 C37.2 C38.1 C39.1 C40.1 C41.1 C42.1 C43.1 C44.1 C45.2 C46.1 C50.1 C51.1 C52.1 C53.1 C54.1 C55.1 C56.1 C57.1 D4.2 D5.2 D6.2 D7.2 D8.2 D9.2 D10.2 D11.2 D12.2 Display1.1 Display1.5 Display1.16 EA.3 EB.3 EC.3 ED.3 J1.3 J3.2 J4.3 MltPlx.3 OptoCplr.5 P1.1 P1.3 P2.2 P2.3 Power.2 Q1.1 Q2.1 Q3.2 R9.1 R22.2 R24.2 R25.2 R27.2 R31.2 R32.2 R41.2 R42.2 R56.2 R63.2 R69.2 R75.2 R80.2 R86.2 S1.2 S2.2 S3.2 S4.2 S5.2 U1.9 U1.20 U1.25 U1.41 U3B.2 U3D.3 U4C.3 U5A.3 U5B.3 U6B.2 U6C.2 U7A.3 U7B.3 U8A.3 Volume.3 VR1.2 VR2.2 | length 614.4
  Top Layer w0.2: C57.1@-37.389,18.999 -38.862,20.472 -38.862,25.138 S1.2@-36.75,27.25 ; ED.3@-35.044,15 -32.696,17.348 C56.1@-30.023,17.348 ; VR2.2@-32.498,85.175 VR2.2@-32.385,85.288 ; v1(-29.591,66.675) -28.296,66.675 C11.1@-28.245,66.726 ; v1(-29.464,68.961) -28.321,68.961 C12.1@-28.27,68.91 ; v1(-24.13,69.215) -23.114,69.215 C17.1@-23.038,69.291 ; v1(-24.003,65.913) -22.622,67.294 U1.41@-18.885,67.294 ; v1(-14.478,56.896) -14.275,57.099 C13.1@-12.903,57.099 ; v1(-12.954,18.542) -12.751,18.745 C55.1@-11.1,18.745 -11.217,18.862 v1(-11.217,21.717) ; U1.25@-12.946,73.749 -12.946,75.827 C16.1@-12.141,76.632 -12.141,79.578 v1(-12.192,79.629) ; v1(-10.795,79.629) -11.303,79.121 -11.303,77.114 C15.1@-10.795,76.606 -10.795,75.819 -10.398,75.422 U1.20@-10.398,73.749 ; EC.3@-10.044,15.102 -7.061,18.085 C54.1@-1.702,18.085 ; MltPlx.3@-9.652,45.347 -9.602,45.297 -9.028,45.297 -8.852,45.121 -8.852,44.92 v1(-8.382,44.45) ; U1.9@-6.485,67.81 -4.691,67.81 -4.14,67.259 C14.1@-3.759,67.259 -1.854,67.259 v1(-1.778,67.183) ; D8.2@-2.27,41.889 -1.129,40.748 6.458,40.748 7.635,41.925 ; C39.1@6.274,55.448 6.274,54.559 6.716,54.117 7.732,54.117 C40.1@7.747,54.102 ; U5B.3@7.46,44.831 7.635,44.656 7.635,41.925 ; U5A.3@7.46,49.911 8.382,49.911 8.763,50.292 8.763,52.73 C40.1@7.569,53.924 ; C42.1@10.363,41.072 9.728,41.072 9.093,41.707 C41.1@8.585,41.707 7.853,41.707 7.635,41.925 ; C53.1@14.275,17.831 14.956,17.15 EB.3@14.956,15 17.177,17.221 C52.1@19.126,17.221 ; v1(15.189,47.193) R69.2@15.189,48.438 ; D6.2@17.73,41.889 18.491,42.65 R75.2@18.491,43.51 ; Display1.5@32.64,82.193 34.62,80.213 R9.1@34.62,79.832 34.566,79.778 OptoCplr.5@34.566,77.47 ; C51.1@36.881,18.593 39.956,15.518 39.956,15.699 41.478,17.221 C50.1@41.478,18.491 ; R80.2@37.541,43.637 37.541,42.078 D4.2@37.73,41.889 38.725,40.894 U6B.2@39.845,40.894 ; R86.2@37.668,36.017 37.668,33.951 D5.2@37.73,33.889 ; C44.1@94.818,81.229 C43.1@94.818,84.277 C45.2@94.818,85.903 C46.1@94.818,87.579 R27.2@94.818,89.357 v1(99.949,89.357) U3B.2@101.491,89.357 ; v1(105.283,90.17) 105.664,90.551 U3D.3@106.967,90.551
  Top Layer w0.5: VR1.2@-48.274,80.306 -48.768,79.812 -48.768,78.232 -48.057,77.521 C2.2@-47.422,77.521 ; C1.2@-40.462,83.007 -39.929,83.007 v1(-39.243,83.693) -39.243,84.833 -39.675,85.265 C3.2@-39.675,87.681 ; C8.1@-33.401,106.386 -32.675,107.112 C9.1@-28.88,107.112 ; VR2.2@-32.385,85.288 v1(-32.385,87.249) ; P1.3@-31.496,95.504 -29.261,93.269 -29.032,93.269 ; C4.2@-30.353,85.954 v1(-30.353,87.249) ; v1(-24.511,100.203) -24.206,99.898 C10.1@-22.784,99.898 ; v1(-21.59,92.202) -20.498,91.11
  Bottom Layer w0.2: v1(-48.768,78.105) -38.481,67.818 ; D12.2@-42.27,33.889 -42.27,37.994 -41.529,38.735 -39.878,38.735 -36.75,35.607 S1.2@-36.75,27.25 -35.044,25.544 ED.3@-35.044,15 -32.998,12.954 -12.09,12.954 ; Volume.3@-37.425,54.237 -37.425,66.762 -38.481,67.818 ; P1.1@-34.036,92.934 -32.385,91.283 ; v1(-32.385,87.249) -32.385,91.283 ; v1(-30.353,87.249) -30.353,89.251 -32.385,91.283 ; v1(-29.591,66.675) -29.845,66.675 -30.988,67.818 ; v1(-29.464,68.961) -29.845,68.961 -30.988,67.818 ; v1(-24.13,69.215) -25.527,67.818 ; D10.2@-22.27,41.889 -15.727,41.889 -15.24,41.402 -15.24,40.132 ; v1(-21.59,92.202) -21.59,89.027 v1(-12.192,79.629) v1(-10.795,79.629) ; v1(-14.478,56.896) -14.986,56.896 v1(-24.003,65.913) -25.527,67.437 -25.527,67.818 ; v1(-12.954,18.542) -10.044,15.632 EC.3@-10.044,15 -12.09,12.954 ; v1(-11.217,21.717) S2.2@-16.75,27.25 -16.75,28.369 D11.2@-22.27,33.889 -16.403,33.889 -15.24,35.052 -15.24,40.132 ; v1(-8.382,44.45) -7.493,43.561 -7.493,41.021 -8.382,40.132 -15.24,40.132 ; D8.2@-2.27,41.889 D9.2@-2.27,33.889 -2.27,32.77 S3.2@3.25,27.25 ; EB.3@14.956,15 14.956,14.448 13.462,12.954 ; v1(15.189,47.193) 15.189,44.43 D6.2@17.73,41.889 D7.2@17.73,33.889 17.73,30.022 20.502,27.25 S4.2@23.25,27.25 ; D4.2@37.73,41.889 37.73,39.127 36.576,37.973 36.576,35.043 D5.2@37.73,33.889 D5.2@37.73,33.644 ; J4.3@48.133,41.148 48.006,41.021 48.006,39.878 40.386,32.258 39.116,32.258 D5.2@37.73,33.644 ; v1(99.949,89.357) 104.47,89.357 v1(105.283,90.17) ; -38.481,67.818 -30.988,67.818 ; -30.988,67.818 -25.527,67.818 ; -12.09,12.954 13.462,12.954 ; 13.462,12.954 37.91,12.954 EA.3@39.956,15 39.956,16.969 41.275,18.288 41.275,25.275 S5.2@43.25,27.25 41.203,27.25 37.73,30.723 D5.2@37.73,33.644
  Bottom Layer w0.5: C5.2@-46.442,90.892 v1(-39.243,83.693) ; P1.3@-31.496,95.504 -28.194,92.202 v1(-21.59,92.202) ; -26.162,102.235 -26.162,101.854 v1(-24.511,100.203)
  Bottom Layer w1: v1(-48.768,78.105) -46.442,80.431 -46.442,90.892 C5.2@-46.442,91.567 -42.037,95.972 ; Power.2@-42.037,106.68 -42.037,104.013 ; P1.3@-31.496,95.504 -34.036,92.964 P1.1@-34.036,92.934 -38.999,92.934 -42.037,95.972 ; P2.2@-15.557,99.123 -18.669,102.235 -26.162,102.235 -29.25,102.235 C8.1@-33.401,106.386 -35.774,104.013 -42.037,104.013 ; -42.037,95.972 -42.037,104.013
NetC1_1: C1.1 C3.1 C5.1 C6.1 D1.4 VR1.1 VR2.1 VR3.1 | length 38.3
  Top Layer w1.5: -42.926,80.645 -42.926,88.392 -41.442,89.876 C5.1@-41.442,91.567 -40.172,90.297 -28.321,90.297 -26.67,91.948 -26.67,92.4 VR3.1@-26.501,92.569 ; -39.203,90.003 -37.098,87.898 VR2.1@-37.098,85.175
  Top Layer w2.5: -43.16,95.25 -43.16,93.285 C5.1@-41.442,91.567
NetC8_2: C8.2 C9.2 D1.3 VR4.1 | length 19.2
  Top Layer w1: C9.2@-28.88,105.613 -28.702,105.791 -26.035,105.791 VR4.1@-25.4,105.156 VR4.1@-25.4,106.426
  Top Layer w1.25: C8.2@-33.401,101.386 -29.682,105.105 ; -29.388,105.105 C9.2@-28.88,105.613
  Top Layer w2.5: -39.761,97.165 -35.54,101.386 C8.2@-33.401,101.386
NetC11_2: C11.2 U1.40 Y1.2 | length 11.4
  Top Layer w0.2: C11.2@-28.321,65.224 -25.527,65.224 -25.527,66.802 -24.519,67.81 U1.40@-18.885,67.81 ; C11.2@-28.245,65.227 C11.2@-28.242,65.224